# Altium PCB PBL4_PCB.PcbDoc (part 2 of 2)
Units mm, origin at the board's own origin, x right, y up, seen from the top; angles counter-clockwise.
Board outline 110 x 80 mm, 2 copper layers (Top Layer, Bottom Layer); 81 components, 62 nets, 303 pads, 24 vias.
Unrouted connection lines stored in the file: 115.
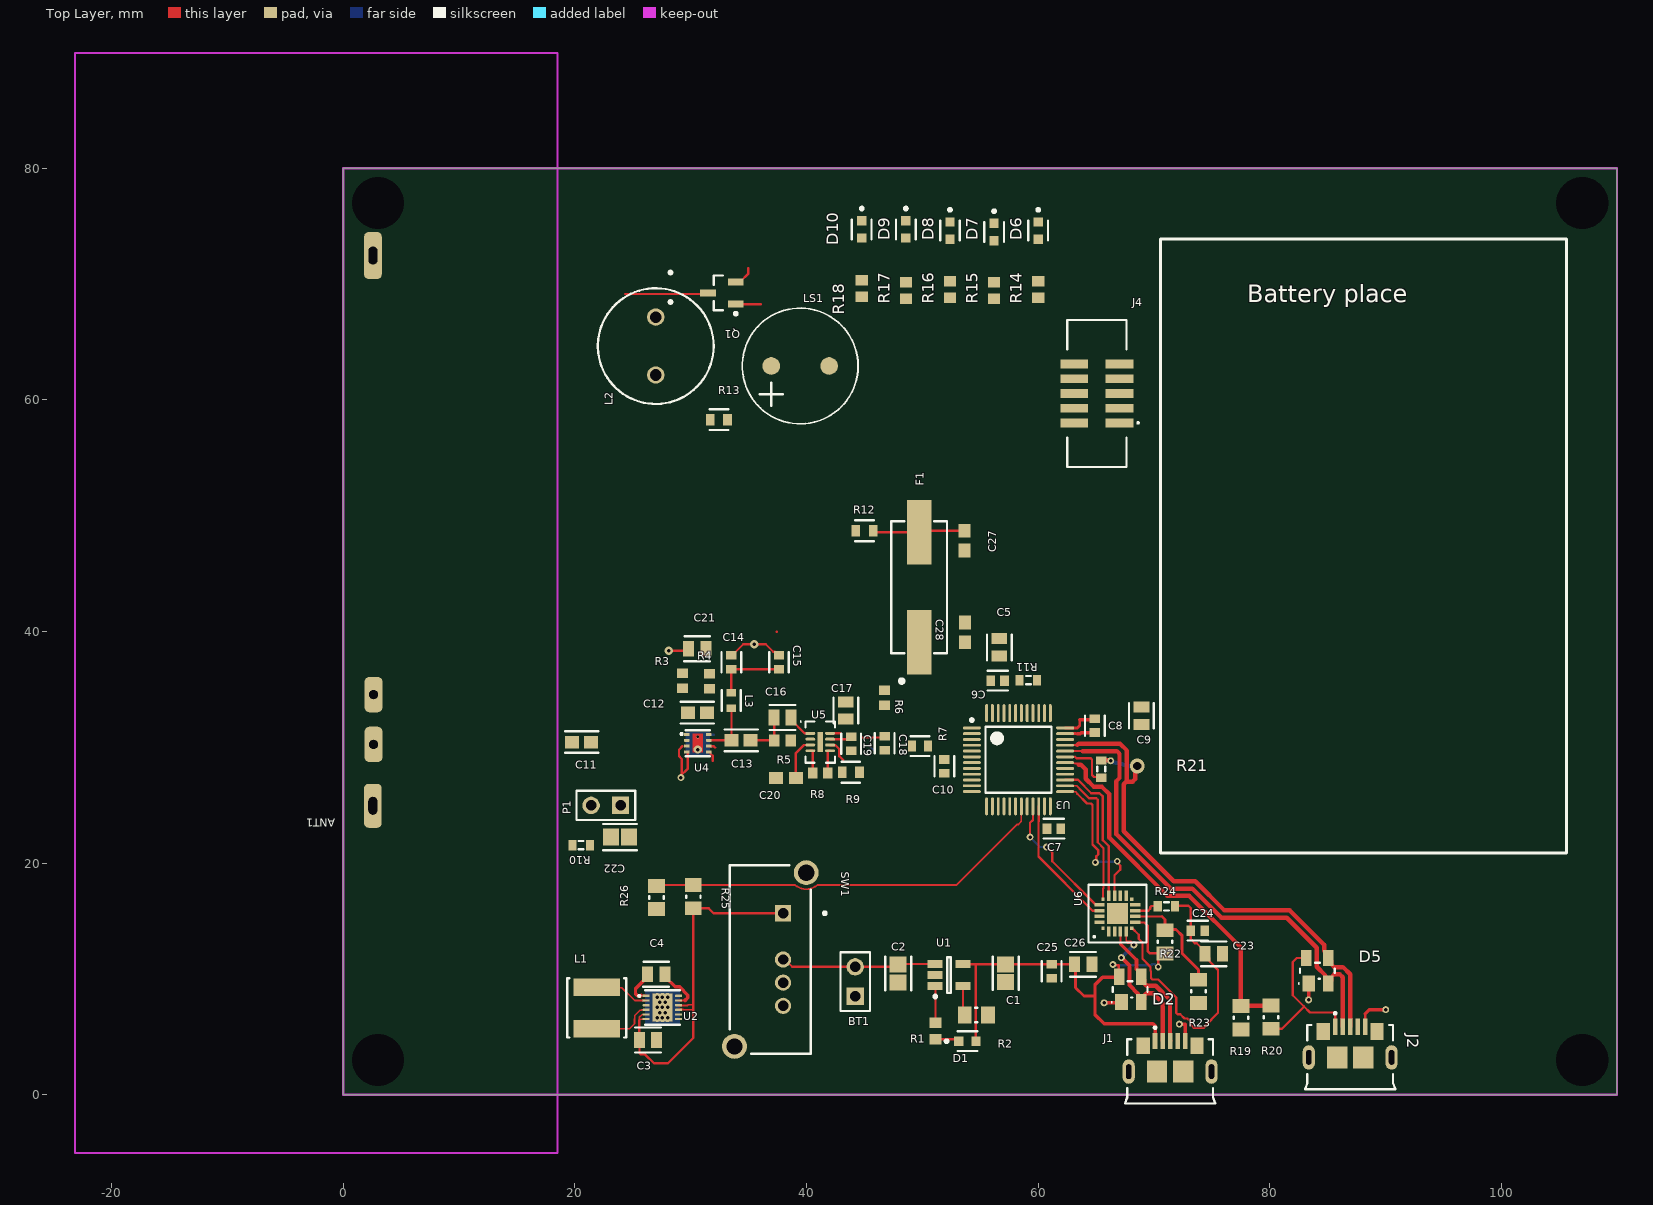
[diagram p0: Top Layer view]

## Via types
v1: diameter 0.711, hole 0.3, Top Layer to Bottom Layer, 16 vias
v2: diameter 0.6, hole 0.3, Top Layer to Bottom Layer, 7 vias
v3: diameter 1.27, hole 0.711, Top Layer to Bottom Layer, 1 vias

## Nets (pads, with @x,y where several pads share a name; then routed paths per layer and width w, separated by ;. In a path a pad name is that pad's centre, name@x,y a point inside that pad or via, vN(x,y) a via of type N, cw(c..) or ccw(c..) an arc to the next point about the centre after c; other vN are vias at no path point) (continued)
pads on no net: ANT1.1 ANT1.3 ANT1.4 J1.4 J1.S1 J1.S2 J1.S3 J1.S4 J1.S5 J1.S6 J2.4 J2.S1 J2.S2 J2.S3 J2.S4 J2.S5 J2.S6 J4.5 J4.7 LS1.24 LS1.25 SW1.3 SW1.4 SW1.5 SW1.6 U2.7 U2.8 U2.PAD U3.1 U3.2 U3.3 U3.4 U3.10 U3.13 U3.14 U3.15 U3.16 U3.17 U3.18 U3.20 U3.28 U3.29 U4.3 U4.4 U4.6 U4.8 U6.1 U6.2 U6.10 U6.11 U6.19 U6.20
copper on no net: | length 6.1
  Top Layer w0.2: 29.291,30.1 28.985,29.794 28.985,29.244 29.235,28.994 29.235,27.474 v2(29.148,27.386) 29.148,27.533 29.735,28.121 29.735,29.55 29.685,29.6 29.66,29.6 ; 31.56,30.1 31.567,30.093 31.992,30.093 32.11,29.975
  other v1: 27.11,6.63 27.56,6.63 28.01,6.63 27.335,7.08 27.785,7.08 27.11,7.53 27.56,7.53 28.01,7.53 27.335,7.98 27.785,7.98 27.11,8.43 27.56,8.43 28.01,8.43

## Keep-outs
Keep-Out Layer:
  the board outline again, w0.2

## Silkscreen, mask and mechanical layers (free items; w line width, h text height)
Top Overlay:
  lines w0.254: 105.58,20.88 70.58,20.88 70.58,73.88 105.63,73.88 105.63,20.88
  text "Battery place" at 78.084,68.442 h1.52

## Text inside footprints (layer, text, board x,y; h text height)
J1: Mechanical 13 "PCB EDGE" at 75.821,0.585 h0.7
J2: Mechanical 13 "PCB EDGE" at 91.376,1.815 h0.7